# Altium PCB GND CON.PcbDoc
Units mil, origin at the board's own origin, x right, y up, seen from the top; angles counter-clockwise.
Board outline 905 x 515 mil, 2 copper layers (Top Layer, Bottom Layer); 4 components, 7 nets, 11 pads, 10 vias.
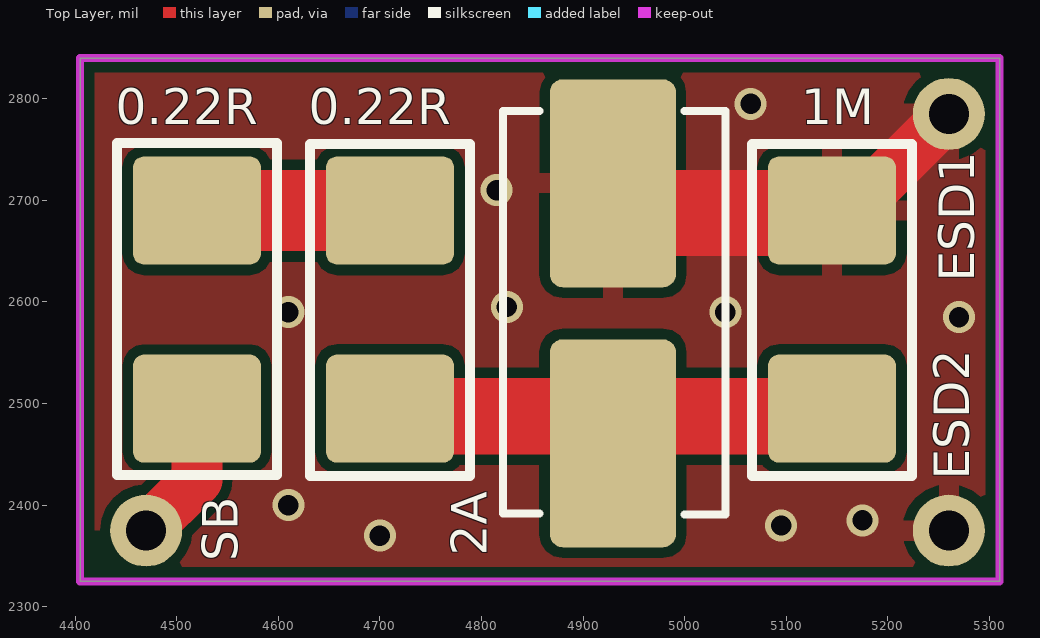
[diagram p0: Top Layer view]
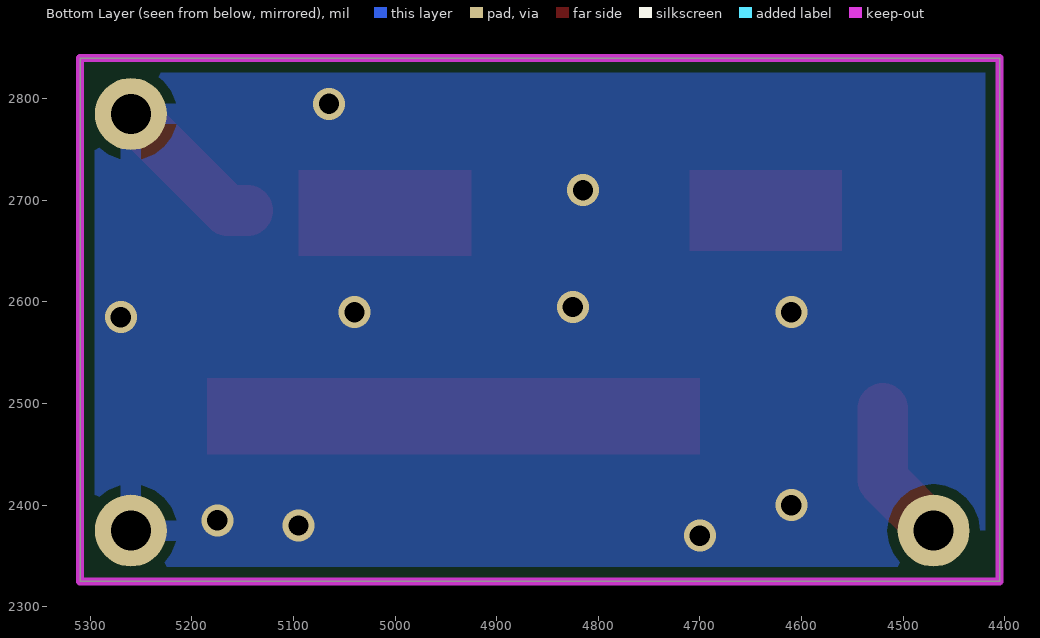
[diagram p1: Bottom Layer view, seen from below]
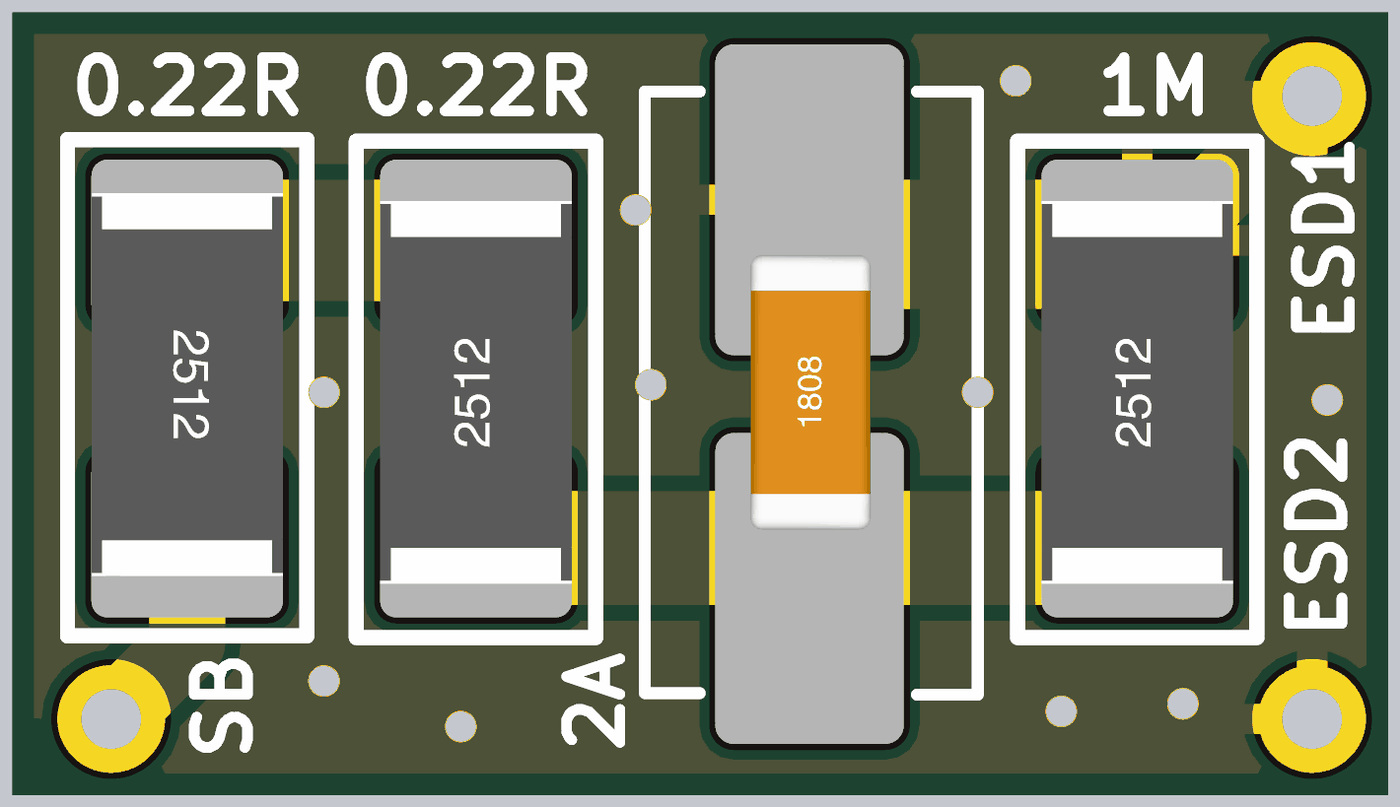
[diagram p2: 3D render of the assembled board from above, using the file's embedded part models]

## Layer stack, top to bottom
Top Solder: solder mask 0.4, Solder Resist, Dk 3.5
Top Layer: signal copper 1.4
Dielectric1: dielectric 12.6, FR-4, Dk 4.8
Bottom Layer: signal copper 1.4
Bottom Solder: solder mask 0.4, Solder Resist, Dk 3.5

## Board outline
4405,2325 4405,2840 5310,2840 5310,2325

## Design rules (kind name [scope] priority, off if disabled: settings)
Clearance [All] p1: gap=10 ignorepadtopadclearanceinfootprint=FALSE except(0: Arc-Hole Track-Hole SMDPad-Hole THPad-Hole Via-Hole Fill-Hole Poly-Hole Region-Hole Text-Hole)
PolygonConnect ISVIA [All vs IsVia] p1: connectstyle=Direct reliefconductorwidth=10 reliefentries=4 polygonreliefangle="90 Angle" airgapwidth=10
PolygonConnect [All] p2: connectstyle=Relief reliefconductorwidth=20 reliefentries=4 polygonreliefangle="90 Angle" airgapwidth=10
RoutingVias [All] p1: holewidth=28 width=50 viastyle="Through Hole" minholewidth=28 minwidth=50 maxholewidth=28 maxwidth=50
SilkToSolderMaskClearance SilkscreenOverComponentPads [IsPad] p1: minsilkscreentomaskgap=10 clearancetoexposedcopper=TRUE
SolderMaskExpansion [All] p1: expansion=4 istentingtop=FALSE
Width [All] p1: maxlimit=196.85 minlimit=10 preferedwidth=196.85
29 further rules are at their usual default settings.

## Components (designator, comment, footprint, x,y, rotation, side; value= is the part's Value field where it differs from the comment)
0.22R "Comment" "R 2512_L" 4520,2595 r270 top
0.22R "Comment" "R 2512_L" 4710,2590 r90 top
1M "Comment" "R 2512_L" 5145,2590 r90 top
2A "Comment" FUSE 4930,2590 r90 top

## Footprints (in the part's own frame and the unit in brackets; to place one, negate y for a bottom-side part, rotate by r counter-clockwise, add the part's x,y. Pads: shape width x height; smd on the part's side, far side on the other; paste and mask are expansions set on the pad)
FUSE [mm]
  rrect20% 5.2x3.15 smd: 1(-3.28,0.016) 2(3.22,0.016)
  silkscreen extent -5.05,-2.8 5.03,2.77, body extent -5.05,-2.52 5.02,2.51, height 2.65
"R 2512_L" [mm]
  rrect20% 2.7x3.2 smd: 1(-2.413,0) 2(2.54,0)
  silkscreen extent -4.1,-2 4.2,2, body extent -3.2,-1.6 3.2,1.6, height 0.55

## Free pads (board coordinates)
  round 70.87 hole 39.37: 0(4470,2375) 0(5260,2375) 0(5260,2785)

## Via types
v1: diameter 31.5, hole 20, Top Layer to Bottom Layer, tented both sides, 10 vias

## Nets (pads, with @x,y where several pads share a name; then routed paths per layer and width w, separated by ;. In a path a pad name is that pad's centre, name@x,y a point inside that pad or via, vN(x,y) a via of type N, cw(c..) or ccw(c..) an arc to the next point about the centre after c; other vN are vias at no path point)
$Net56: 0.22R.2@4520,2495 pad.0@4470,2375 | length 140.7
  Top Layer w50: pad.0@4470,2375 4520,2425 0.22R.2@4520,2495
ESD: 1M.2 2A.2 pad.0@5260,2375 pad.0@5260,2785 | length 154.4
  Top Layer w50: 1M.2 5165,2690 pad.0@5260,2785
  other v1: 4700,2370 5095,2380 5175,2385 4610,2400 5270,2585 4610,2590 5040,2590 4825,2595 4815,2710 5065,2795
ESD1: 0.22R.1@4520,2690 0.22R.2@4710,2690
G: 
HT: 
VCCK: 0.22R.1@4710,2495 1M.1 2A.1
XM: 

## Polygon pours and split planes (outlines as drawn)
ESD on Top Layer "Bottom Layer-No Net" (solid, remove dead copper, pour order 4): 4405,2840 5280,2840 5305,2815 5305,2350 5280,2325 4420,2325 4415,2330 4400,2345 4400,2375
ESD on Bottom Layer "Bottom Layer-No Net" (solid, remove dead copper, pour order 6): 4405,2840 5310,2840 5310,2790 5310,2325 5210,2325 4405,2325 4405,2840

## Keep-outs
Keep-Out Layer:
  the board outline again, w7.87

## Other copper
Top Layer:
  rectangle net ESD: 4925,2645 5095,2730
  rectangle net VCCK: 4700,2450 5185,2525
  rectangle net ESD1: 4560,2650 4710,2730

## Silkscreen, mask and mechanical layers (free items; w line width, h text height)
Top Overlay:
  text "ESD1" at 5285,2620 h35 r90
  text "ESD2" at 5280,2425 h35 r90
  text "SB" at 4560,2345 h35 r90